# Altium PCB PCB_vibration_array.pcbdoc
Units mm, origin at the board's own origin, x right, y up, seen from the top; angles counter-clockwise.
Board outline 97.15 x 172.35 mm, 2 copper layers (Top Layer, Bottom Layer); 39 components, 51 nets, 149 pads, 13 vias.
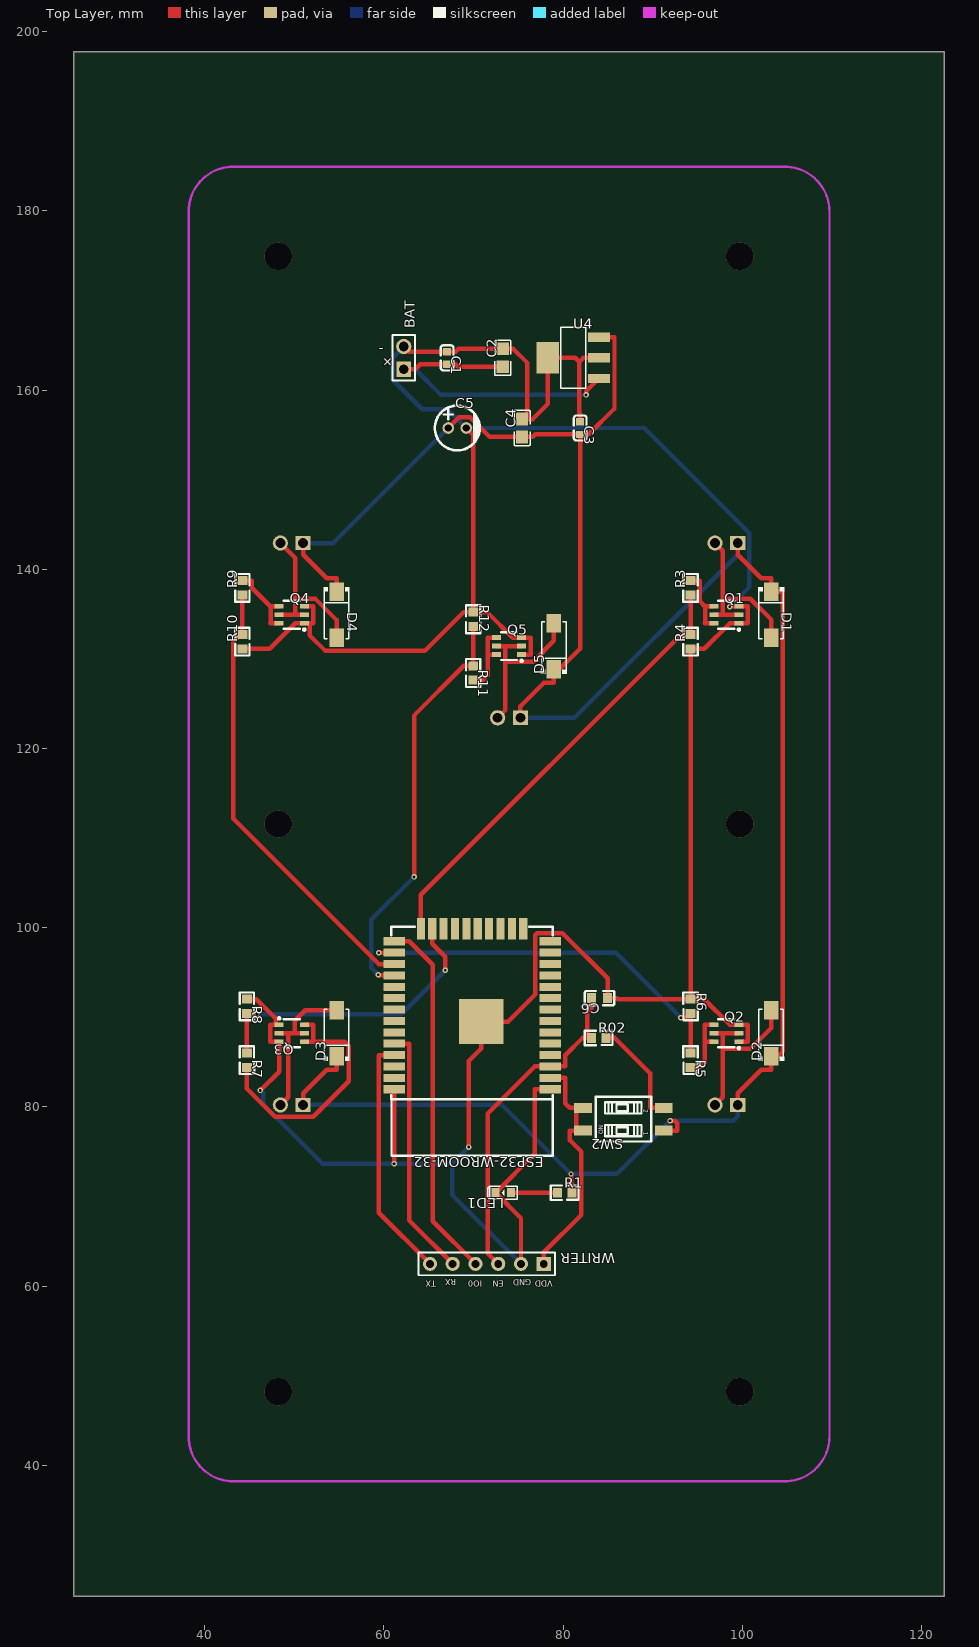
[diagram p0: Top Layer view]
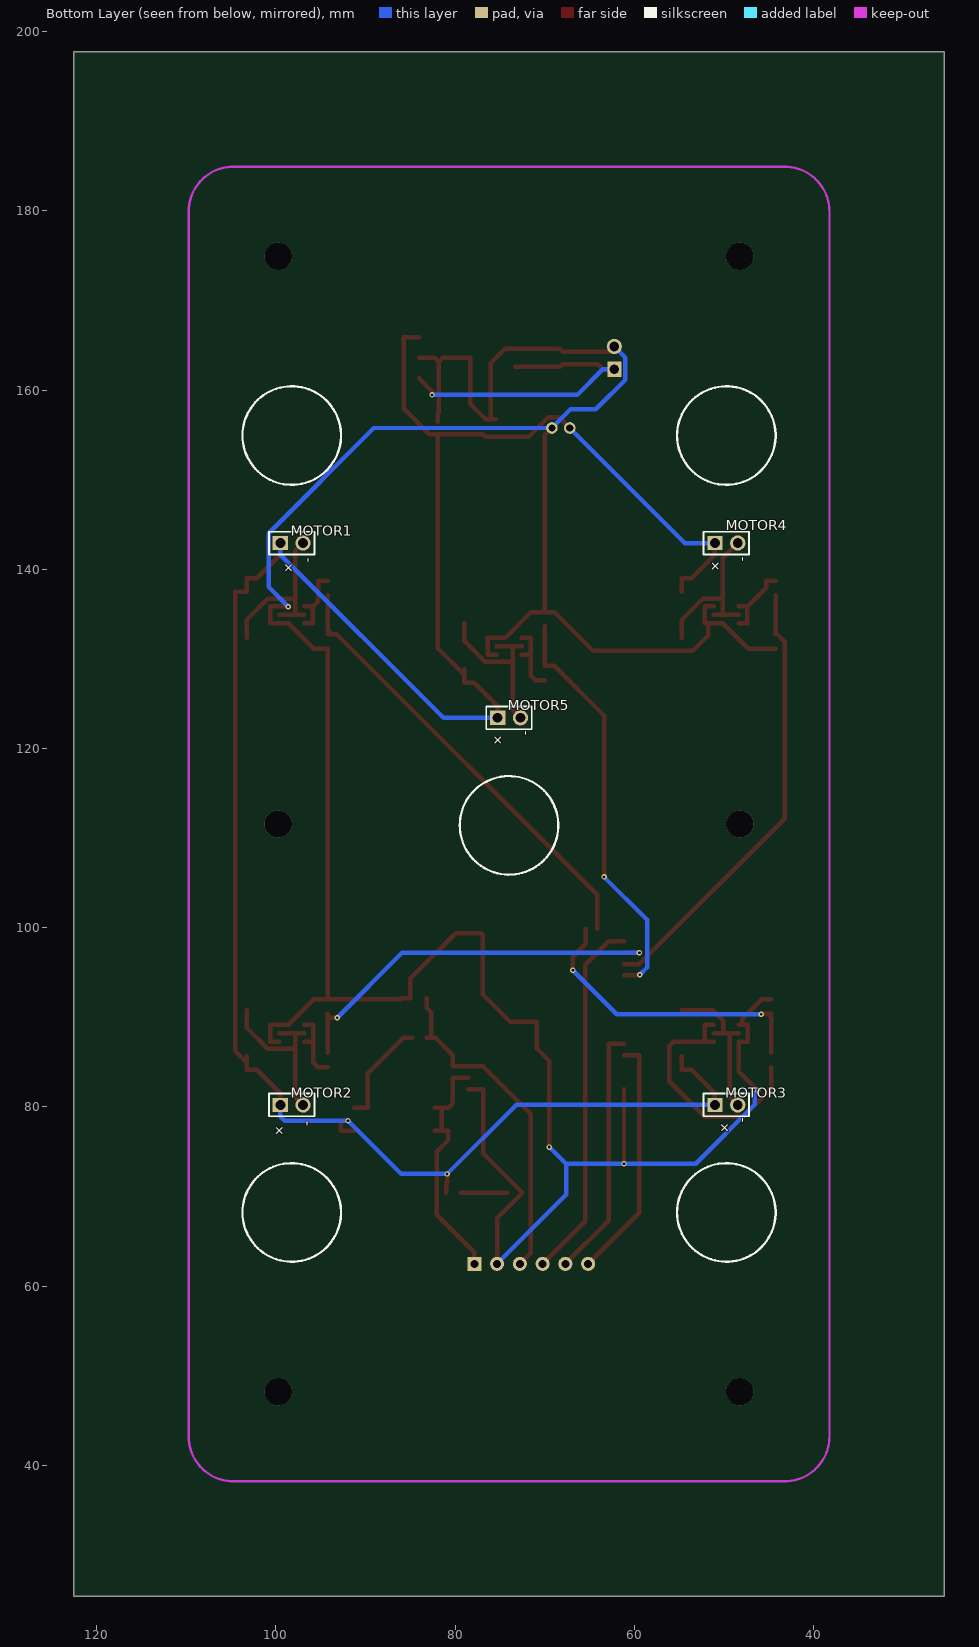
[diagram p1: Bottom Layer view, seen from below]

## Layer stack, top to bottom
Top Layer: signal copper (thickness not stored)
Dielectric: dielectric 0.32, FR-4, Dk 4.8
Bottom Layer: signal copper (thickness not stored)

## Board outline
122.554,25.4 25.4,25.4 25.4,197.754 122.554,197.754

## Components (designator, comment, footprint, x,y, rotation, side; value= is the part's Value field where it differs from the comment)
BAT "HDR-M-2.54_1x2" HDR-M-2.54_1X2#1 62.23,163.591 r90 top
C1 "100nF50V" C0603#1 67.056,163.583 r270 top
C2 "10uF16V" C0805 73.279,163.591 r90 top
C3 "100nF50V" C0603#1 81.915,155.759 r270 top
C4 "10uF16V" C0805 75.438,155.766 r90 top
C5 "22uF" CAP-TH_BD5.0-P2.00-D0.8-FD 68.199,155.766 r0 top
C6 "1uF" C0603#2 84.081,92.146 r180 top
D1 "SS14" SMA_L4.4-W2.8-LS5.4-RD 103.227,134.927 r270 top
D2 "SS14" SMA_L4.4-W2.8-LS5.4-RD 103.227,88.227 r90 top
D3 "SS14" SMA_L4.4-W2.8-LS5.4-RD 54.727,88.227 r90 top
D4 "SS14" SMA_L4.4-W2.8-LS5.4-RD 54.727,134.927 r270 top
D5 "SS14" SMA_L4.4-W2.8-LS5.4-RD 78.977,131.427 r90 top
ESP32-WROOM-32 "ESP32-WROOM-32" WIFIM-SMD_39P-L25.5-W18.0-P1.27 69.85,90.947 r180 top
LED1 "LED-0603_R" LED0603_RED 73.326,70.431 r180 top
MOTOR1 "HDR-M-2.54_1x2" HDR-M-2.54_1X2#2 98.227,142.927 r0 bottom
MOTOR2 "HDR-M-2.54_1x2" HDR-M-2.54_1X2#2 98.227,80.227 r0 bottom
MOTOR3 "HDR-M-2.54_1x2" HDR-M-2.54_1X2#2 49.727,80.227 r0 bottom
MOTOR4 "HDR-M-2.54_1x2" HDR-M-2.54_1X2#2 49.727,142.927 r0 bottom
MOTOR5 "HDR-M-2.54_1x2" HDR-M-2.54_1X2#2 73.977,123.427 r0 bottom
Q1 "FS8205A_C2830320" SOT-23-6_L2.9-W1.6-P0.95-LS2.8-BR 98.227,134.927 r0 top
Q2 "FS8205A_C2830320" SOT-23-6_L2.9-W1.6-P0.95-LS2.8-BR 98.227,88.227 r0 top
Q3 "FS8205A_C2830320" SOT-23-6_L2.9-W1.6-P0.95-LS2.8-BR 49.727,88.227 r180 top
Q4 "FS8205A_C2830320" SOT-23-6_L2.9-W1.6-P0.95-LS2.8-BR 49.727,134.927 r0 top
Q5 "FS8205A_C2830320" SOT-23-6_L2.9-W1.6-P0.95-LS2.8-BR 73.977,131.427 r0 top
R1 "2.2k" R0603 80.184,70.429 r0 top
R02 "10k" R0603 83.981,87.701 r0 top
R3 "470" R0603 94.227,137.927 r90 top
R4 "10k" R0603 94.227,131.927 r90 top
R5 "470" R0603 94.227,85.227 r270 top
R6 "10k" R0603 94.227,91.227 r270 top
R7 "470" R0603 44.727,85.227 r270 top
R8 "10k" R0603 44.727,91.227 r270 top
R9 "470" R0603 44.227,137.927 r90 top
R10 "10k" R0603 44.227,131.927 r90 top
R11 "470" R0603 69.977,128.427 r270 top
R12 "10k" R0603 69.977,134.427 r270 top
SW2 "EM-02-Q" SW-SMD_4P-L5.0-W6.0-P2.54-LS9.8 86.741,78.628 r180 top
U4 "TC1262-3.3VDBTR" SOT-223_L6.5-W3.5-P2.30-LS7.0-BR 81.153,163.591 r0 top
WRITER "HDR-M-2.54_1x6" HDR-M-2.54_1X6 71.501,62.499 r180 top

## Footprints (in the part's own frame and the unit in brackets; to place one, negate y for a bottom-side part, rotate by r counter-clockwise, add the part's x,y. Pads: shape width x height; smd on the part's side, far side on the other; paste and mask are expansions set on the pad)
C0603#1 [mm]
  rect 0.8x0.9 smd: 1(-0.7,0) 2(0.7,0)
  silkscreen extent -1.41,-0.71 1.39,0.72
C0603#2 [mm]
  rect 1x1.1 smd: 1(-0.9,0) 2(0.9,0)
  silkscreen extent -1.65,-0.8 1.65,0.8
C0805 [mm]
  rect 1.41x1.35 smd: 1(-1,0) 2(1,0)
  silkscreen extent -1.96,-0.9 1.96,0.9
CAP-TH_BD5.0-P2.00-D0.8-FD [mm]
  round 1.3 hole 0.8: 1(-1,0) 2(1,0)
  silkscreen extent -2.5,-2.5 2.5,2.5
HDR-M-2.54_1X2#1 [mm]
  rect 1.7x1.575 hole 1.1: 1(-1.27,0)
  round 1.7 hole 1.1: 2(1.27,0)
  silkscreen extent -2.54,-1.27 2.54,1.27
HDR-M-2.54_1X2#2 [mm]
  rect 1.7x1.575 hole 1.1: 1(1.27,0)
  round 1.7 hole 1.1: 2(-1.27,0)
  silkscreen extent -2.54,-1.27 2.54,1.27
HDR-M-2.54_1X6 [mil]
  rect 62x62 hole 35: 1(-250,0)
  round 62 hole 35: 2(-150,0) 3(-50,0) 4(50,0) 5(150,0) 6(250,0)
  silkscreen extent -300,-50 300,50
LED0603_RED [mm]
  rect 0.9x1 smd: 1(-0.85,0) 2(0.85,0)
  silkscreen extent -1.54,-0.73 1.75,0.73
R0603 [mm]
  rect 1x1.1 smd: 1(-0.8,0) 2(0.8,0)
  silkscreen extent -1.55,-0.8 1.55,0.81
SMA_L4.4-W2.8-LS5.4-RD [mm]
  rect 2.046x1.62 smd: 1(-2.566,0) 2(2.565,0)
  silkscreen extent -3.08,-1.44 2.7,1.44
SOT-23-6_L2.9-W1.6-P0.95-LS2.8-BR [mm]
  rect 1x0.55 smd: 1(1.4,-0.95) 2(1.4,0) 3(1.4,0.95) 4(-1.4,0.95) 5(-1.4,0) 6(-1.4,-0.95)
  silkscreen extent -0.9,-1.78 1.52,1.55
SOT-223_L6.5-W3.5-P2.30-LS7.0-BR [mm]
  rect 2.465x1.05 smd: 1(2.857,-2.3) 2(2.857,0) 3(2.857,2.3)
  rect 2.465x3.54 smd: 4(-2.857,0)
  silkscreen extent -1.4,-3.4 1.4,3.4
SW-SMD_4P-L5.0-W6.0-P2.54-LS9.8 [mm]
  rect 2x1.1 smd: 1(-4.5,1.27) 2(-4.5,-1.27) 3(4.5,-1.27) 4(4.5,1.27)
  silkscreen extent -3.1,-2.5 3.1,2.48
WIFIM-SMD_39P-L25.5-W18.0-P1.27 [mm]
  rect 2.4x0.9 smd: 1(-8.7,8.965) 2(-8.7,7.695) 3(-8.7,6.425) 4(-8.7,5.155) 5(-8.7,3.885) 6(-8.7,2.615) 7(-8.7,1.345) 8(-8.7,0.075) 9(-8.7,-1.195) 10(-8.7,-2.465) 11(-8.7,-3.735) 12(-8.7,-5.005) 13(-8.7,-6.275) 14(-8.7,-7.545) 25(8.7,-7.545) 26(8.7,-6.275) 27(8.7,-5.005) 28(8.7,-3.735) 29(8.7,-2.465) 30(8.7,-1.195) 31(8.7,0.075) 32(8.7,1.345) 33(8.7,2.615) 34(8.7,3.885) 35(8.7,5.155) 36(8.7,6.425) 37(8.7,7.695) 38(8.7,8.965)
  rect 0.9x2.4 smd: 15(-5.715,-8.965) 16(-4.445,-8.965) 17(-3.175,-8.965) 18(-1.905,-8.965) 19(-0.635,-8.965) 20(0.635,-8.965) 21(1.905,-8.965) 22(3.175,-8.965) 23(4.445,-8.965) 24(5.715,-8.965)
  rect 5x5 smd: 39(-1.017,1.422)
  silkscreen extent -9.02,-9.17 9.02,16.39

## Free pads (board coordinates)
  round 3.048 hole 3.048 unplated: ""(48.227,48.227) ""(48.227,111.577) ""(48.227,174.927) ""(99.727,48.227) ""(99.727,111.577) ""(99.727,174.927)

## Via types
v1: diameter 0.61, hole 0.305, Top Layer to Bottom Layer, tented both sides, 13 vias

## Nets (pads, with @x,y where several pads share a name; then routed paths per layer and width w, separated by ;. In a path a pad name is that pad's centre, name@x,y a point inside that pad or via, vN(x,y) a via of type N, cw(c..) or ccw(c..) an arc to the next point about the centre after c; other vN are vias at no path point)
3V3: C3.2 C4.1 C5.1 D1.1 D2.1 D3.1 D4.1 D5.1 MOTOR1.1 MOTOR2.1 MOTOR3.1 MOTOR4.1 MOTOR5.1 R1.2 SW2.1 U4.3 | length 267.2
  Top Layer w0.5: MOTOR3.1 50.997,81.515 53.619,84.137 54.727,84.137 D3.1 ; MOTOR4.1 50.997,141.639 53.619,139.016 54.727,139.016 D4.1 ; C5.1 68.387,156.955 69.624,156.955 71.812,154.766 C4.1 76.614,154.766 76.906,155.059 C3.2 ; MOTOR5.1 75.247,124.715 77.87,127.338 78.977,127.338 78.977,128.1 D5.1@78.977,128.217 ; D5.1 D5.1@78.977,128.217 ; v1(80.892,72.523) 80.892,71.572 80.984,71.48 R1.2@80.984,70.429 ; U4.3 85.744,165.891 85.744,157.936 82.866,155.059 C3.2 ; SW2.1 92.742,77.358 92.742,78.196 92.474,78.464 v1(91.948,78.464) ; MOTOR2.1 99.497,81.515 102.119,84.137 103.227,84.137 D2.1@103.227,84.899 ; MOTOR1.1 99.497,141.639 102.119,139.016 103.227,139.016 103.227,137.492 104.538,137.492 104.538,86.21 D2.1@103.227,84.899 ; D2.1 D2.1@103.227,84.899 ; D5.1@78.977,128.217 81.915,131.155 C3.2
  Bottom Layer w0.5: MOTOR3.1 73.188,80.227 v1(80.892,72.523) 86.006,72.523 v1(91.948,78.464) 99.022,78.464 99.497,78.939 MOTOR2.1 ; MOTOR4.1 54.36,142.927 C5.1 ; MOTOR5.1 81.285,123.427 99.497,141.639 MOTOR1.1
D1_2: D1.2 MOTOR1.2 Q1.2 Q1.5 | length 19.6
  Top Layer w0.5: Q1.5 97.327,134.927 97.827,134.927 ; MOTOR1.2 97.827,142.056 97.827,136.713 ; Q1.2 97.827,134.927 ; D1.2@103.227,132.361 103.227,134.394 100.908,136.713 97.827,136.713 ; 97.827,134.927 97.827,136.713
D5_2: D5.2 MOTOR5.2 Q5.2 Q5.5 | length 19.5
  Top Layer w0.5: Q5.5 73.077,131.427 73.577,131.427 ; MOTOR5.2 73.577,124.297 73.577,129.697 ; Q5.2 73.577,131.427 ; D5.2 78.977,132.012 76.662,129.697 73.577,129.697 ; 73.577,129.697 73.577,131.427
EN: C6.2 ESP32-WROOM-32.3 R02.1 WRITER.3 | length 37.7
  Top Layer w0.5: WRITER.3 71.574,63.695 71.574,79.247 76.849,84.522 ESP32-WROOM-32.3 79.4,84.522 80.251,84.522 80.251,85.771 82.18,87.701 82.681,87.701 ; R02.1 82.681,87.701 ; C6.2 83.181,91.095 82.681,90.595 82.681,87.701
GND: BAT.2 C1.1 C2.2 C3.1 C4.2 C5.2 C6.1 ESP32-WROOM-32.1 ESP32-WROOM-32.38 ESP32-WROOM-32.39 LED1.2 Q1.1 Q1.3 Q2.1 Q2.3 Q3.1 Q3.3 Q4.1 Q4.3 Q5.1 Q5.3 R4.1 R6.1 R8.1 R10.1 R12.1 U4.2 U4.4 WRITER.2 | length 369.6
  Top Layer w0.5: R10.1 47.277,131.127 50.126,133.977 50.826,133.977 Q4.1 51.627,133.977 51.754,133.977 ; R8.1 45.778,92.027 47.965,89.84 Q3.1@47.965,89.177 ; v1(46.225,81.846) 48.327,83.948 Q3.3 47.326,87.277 47.326,89.177 Q3.1@47.965,89.177 ; Q3.1 Q3.1@47.965,89.177 ; Q4.3 52.128,135.877 52.128,133.977 51.754,133.977 ; v1(61.15,73.661) ESP32-WROOM-32.38 ; BAT.2 62.808,164.283 C1.1 68.007,164.283 68.315,164.591 73.279,164.591 73.867,164.591 74.455,164.591 76.026,163.019 C4.2@76.026,156.766 ; C5.2 69.977,154.988 R12.1 ; v1(69.478,75.527) 69.478,85.135 70.867,86.524 ESP32-WROOM-32.39 73.868,89.525 76.898,92.555 76.898,99.198 77.094,99.393 79.937,99.393 84.981,94.349 C6.1 85.481,92.146 85.982,92.146 86.101,92.027 R6.1 ; WRITER.2 75.311,67.596 LED1.2 76.849,74.804 76.849,81.982 ESP32-WROOM-32.1 ; Q5.1 76.378,130.477 76.378,132.377 Q5.3 74.376,132.377 71.526,135.227 R12.1 ; C4.2 C4.2@76.026,156.766 ; C3.1 81.915,157.359 81.816,157.458 81.816,163.13 ; U4.2 82.277,163.591 81.816,163.13 ; v1(98.602,135.833) 98.626,135.857 98.626,135.877 Q1.3 100.627,135.877 100.627,133.977 Q1.1 99.326,133.977 98.626,133.977 95.776,131.127 R4.1 94.227,93.027 R6.1 ; Q2.1 100.627,87.277 100.627,89.177 Q2.3 98.626,89.177 95.776,92.027 R6.1 ; 51.754,133.977 51.754,132.619 53.486,130.887 64.586,130.887 68.926,135.227 R12.1 ; C4.2@76.026,156.766 76.614,156.766 78.295,158.448 U4.4 81.355,163.591 81.816,163.13
  Bottom Layer w0.5: v1(46.225,81.846) 46.543,81.528 46.543,80.269 53.151,73.661 v1(61.15,73.661) 67.613,73.661 ; BAT.2 60.991,163.622 60.991,161.165 64.301,157.856 67.11,157.856 C5.2 89.07,155.766 100.798,144.038 100.798,138.029 v1(98.602,135.833) ; v1(69.478,75.527) 67.613,73.661 ; WRITER.2 67.613,70.197 67.613,73.661
IO0: ESP32-WROOM-32.25 WRITER.4 | length 40.8
  Top Layer w0.5: ESP32-WROOM-32.25 62.851,98.492 65.475,95.868 65.475,67.255 WRITER.4
PWM1: ESP32-WROOM-32.24 R3.1 R4.2 | length 50.5
  Top Layer w0.5: ESP32-WROOM-32.24 64.135,103.686 93.176,132.727 R4.2@93.702,132.727 ; R4.2 R4.2@93.702,132.727 ; R3.1 94.227,133.252 R4.2@93.702,132.727
PWM2: ESP32-WROOM-32.26 R5.1 R6.2 | length 43.9
  Top Layer w0.5: v1(59.43,97.202) 59.449,97.222 ESP32-WROOM-32.26 ; v1(93.161,89.955) R6.2@94.227,89.955 ; R5.1 R6.2@94.227,89.955 ; R6.2 R6.2@94.227,89.955
  Bottom Layer w0.5: v1(59.43,97.202) 85.914,97.202 v1(93.161,89.955)
PWM3: ESP32-WROOM-32.23 R7.1 R8.2 | length 34
  Top Layer w0.5: R7.1 44.727,90 R8.2@45.154,90.427 ; R8.2 R8.2@45.154,90.427 ; v1(45.848,90.357) 45.778,90.427 R8.2@45.154,90.427 ; ESP32-WROOM-32.23 65.405,98.211 66.851,96.765 v1(66.851,95.255)
  Bottom Layer w0.5: v1(45.848,90.357) 61.953,90.357 v1(66.851,95.255)
PWM4: ESP32-WROOM-32.27 R9.1 R10.2 | length 50.1
  Top Layer w0.5: R9.1 R10.2 44.027,132.727 43.225,131.925 43.225,112.176 59.449,95.952 ESP32-WROOM-32.27
PWM5: ESP32-WROOM-32.28 R11.1 R12.2 | length 46.3
  Top Layer w0.5: v1(59.394,94.751) 59.449,94.695 59.449,94.682 ESP32-WROOM-32.28 ; v1(63.376,105.672) 63.376,123.676 68.926,129.227 R11.1 R12.2
  Bottom Layer w0.5: v1(59.394,94.751) 58.581,95.564 58.581,100.878 v1(63.376,105.672)
Q2_2: D2.2 MOTOR2.2 Q2.2 Q2.5 | length 19.5
  Top Layer w0.5: Q2.5 97.327,88.227 97.827,88.227 ; MOTOR2.2 97.827,81.097 97.827,86.497 ; Q2.2 97.827,88.227 ; D2.2 103.227,88.812 100.912,86.497 97.827,86.497 ; 97.827,86.497 97.827,88.227
Q2_4: Q2.4 Q2.6 R5.2 | length 8
  Top Layer w0.5: R5.2 95.277,84.427 95.826,84.975 95.826,87.277 ; Q2.6 95.826,87.277 ; Q2.4 95.826,89.177 95.826,87.277
Q3_2: D3.2 MOTOR3.2 Q3.2 Q3.5 | length 17.7
  Top Layer w0.5: Q3.2 49.328,88.227 ; MOTOR3.2 49.328,81.097 49.328,88.227 ; Q3.5 50.077,88.227 ; D3.2 51.233,90.792 50.077,89.636 50.077,88.227 ; 49.328,88.227 50.077,88.227
Q3_4: Q3.4 Q3.6 R7.2 | length 28.7
  Top Layer w0.5: R7.2 44.727,82.049 47.87,78.906 52.144,78.906 56.104,82.866 56.104,86.807 55.634,87.277 52.128,87.277 ; Q3.4 52.128,87.277 ; Q3.6 52.128,89.177 52.128,87.277
Q4_2: D4.2 MOTOR4.2 Q4.2 Q4.5 | length 19
  Top Layer w0.5: Q4.5 50.126,134.927 ; MOTOR4.2 50.126,141.258 50.126,136.689 ; Q4.2 50.126,134.927 ; D4.2 54.727,134.342 52.38,136.689 50.126,136.689 ; 50.126,134.927 50.126,136.689
Q4_4: Q4.4 Q4.6 R9.2 | length 8.7
  Top Layer w0.5: R9.2 45.278,138.727 45.278,137.926 47.326,135.877 47.375,135.877 ; Q4.6 47.326,133.977 47.375,134.026 47.375,135.877 ; Q4.4 47.526,135.877 47.375,135.877
R1_1: LED1.1 R1.1 | length 5.2
  Top Layer w0.5: LED1.1 75.127,70.431 75.129,70.429 R1.1
R02_2: R02.2 SW2.2 | length 11.9
  Top Layer w0.5: R02.2 85.782,87.701 89.74,83.742 89.74,79.898 SW2.2
R3_2: Q1.4 Q1.6 R3.2 | length 8
  Top Layer w0.5: R3.2 95.277,138.727 95.277,136.425 95.826,135.877 95.875,135.877 ; Q1.6 95.826,133.977 95.875,134.026 95.875,135.877 ; Q1.4 96.026,135.877 95.875,135.877
R11_2: Q5.4 Q5.6 R11.2 | length 8
  Top Layer w0.5: R11.2 71.028,127.627 71.576,128.175 71.576,130.477 ; Q5.6 71.576,130.477 ; Q5.4 71.576,132.377 71.576,130.477
RX: ESP32-WROOM-32.34 WRITER.5 | length 28.3
  Top Layer w0.5: ESP32-WROOM-32.34 62.851,87.062 62.851,67.339 WRITER.5
SCL1: ESP32-WROOM-32.36
SCL2: ESP32-WROOM-32.31
SDA1: ESP32-WROOM-32.33
SDA2: ESP32-WROOM-32.30
TX: ESP32-WROOM-32.35 WRITER.6 | length 27.4
  Top Layer w0.5: ESP32-WROOM-32.35 59.449,85.792 59.449,68.2 WRITER.6
U1_4: ESP32-WROOM-32.4
U1_5: ESP32-WROOM-32.5
U1_6: ESP32-WROOM-32.6
U1_7: ESP32-WROOM-32.7
U1_8: ESP32-WROOM-32.8
U1_9: ESP32-WROOM-32.9
U1_10: ESP32-WROOM-32.10
U1_11: ESP32-WROOM-32.11
U1_12: ESP32-WROOM-32.12
U1_13: ESP32-WROOM-32.13
U1_14: ESP32-WROOM-32.14
U1_15: ESP32-WROOM-32.15
U1_16: ESP32-WROOM-32.16
U1_17: ESP32-WROOM-32.17
U1_18: ESP32-WROOM-32.18
U1_19: ESP32-WROOM-32.19
U1_20: ESP32-WROOM-32.20
U1_21: ESP32-WROOM-32.21
U1_22: ESP32-WROOM-32.22
U1_29: ESP32-WROOM-32.29
U1_32: ESP32-WROOM-32.32
U1_37: ESP32-WROOM-32.37
VDD: ESP32-WROOM-32.2 SW2.3 SW2.4 WRITER.1 | length 27.9
  Top Layer w0.5: WRITER.1 77.851,63.787 82.054,67.989 82.054,74.994 80.741,76.307 80.741,77.358 SW2.4@81.491,77.358 ; ESP32-WROOM-32.2 80.251,83.252 80.251,80.388 80.741,79.898 SW2.3@81.491,79.898 ; SW2.4 SW2.4@81.491,77.358 ; SW2.3 SW2.3@81.491,79.898 ; SW2.4@81.491,77.358 SW2.3@81.491,79.898
VIN+: BAT.1 C1.2 C2.1 U4.1 | length 35.4
  Top Layer w0.5: BAT.1 63.518,162.321 64.08,162.883 C1.2 68.007,162.883 68.299,162.591 C2.1 ; v1(82.573,159.456) 82.573,159.853 U4.1
  Bottom Layer w0.5: BAT.1 63.518,162.321 66.383,159.456 v1(82.573,159.456)

## Keep-outs
Keep-Out Layer:
  lines w0.254: 38.227,43.227 ccw(c43.227,43.227) 43.227,38.227 ; 38.227,179.927 cw(c43.227,179.927) 43.227,184.927 ; 104.727,38.227 ccw(c104.727,43.227) 109.727,43.227 ; 104.727,184.927 cw(c104.727,179.927) 109.727,179.927

## Silkscreen, mask and mechanical layers (free items; w line width, h text height)
Top Overlay:
  text "-" at 60.008,165.051 h1.14 r180
  text "+" at 60.348,162.298 h1.14 r45
  text "RX" at 68.072,60.975 h1.14 r180
  text "GND" at 76.454,60.975 h1.14 r181
  text "TX" at 65.868,60.848 h1.14 r180
  text "IO0" at 70.993,60.848 h1.14 r180
  text "EN" at 73.406,60.848 h1.14 r180
  text "VDD" at 78.867,60.848 h1.14 r180
Bottom Overlay:
  circle w0.254: c98.227,154.927 r5.5
  circle w0.254: c49.727,154.927 r5.5
  circle w0.254: c73.977,111.427 r5.5
  circle w0.254: c49.727,68.227 r5.5
  circle w0.254: c98.227,68.227 r5.5
  text "-" at 47.434,140.858 h1.14 r270
  text "-" at 95.948,140.713 h1.14 r270
  text "+" at 50.142,140.246 h1.14 r225
  text "+" at 98.656,139.311 h1.14 r315
  text "-" at 71.691,121.409 h1.14 r270
  text "+" at 74.399,120.815 h1.14 r225
  text "-" at 47.434,78.229 h1.14 r270
  text "-" at 96.075,77.848 h1.14 r270
  text "+" at 98.783,77.254 h1.14 r225
  text "+" at 50.015,76.827 h1.14 r315

## Text inside footprints (layer, text, board x,y; h text height)
SW2: Top Overlay "ON" at 84.491,76.947 h0.5 r90; Top Overlay "1" at 89.031,77.231 h0.5 r270; Top Overlay "2" at 89.013,79.771 h0.5 r270